# Altium PCB IF.PcbDoc
Units mil, origin at the board's own origin, x right, y up, seen from the top; angles counter-clockwise.
Board outline 3650 x 2762 mil, 2 copper layers (Top Layer, Bottom Layer); 46 components, 43 nets, 206 pads, 1032 vias.
Unrouted connection lines stored in the file: 1.
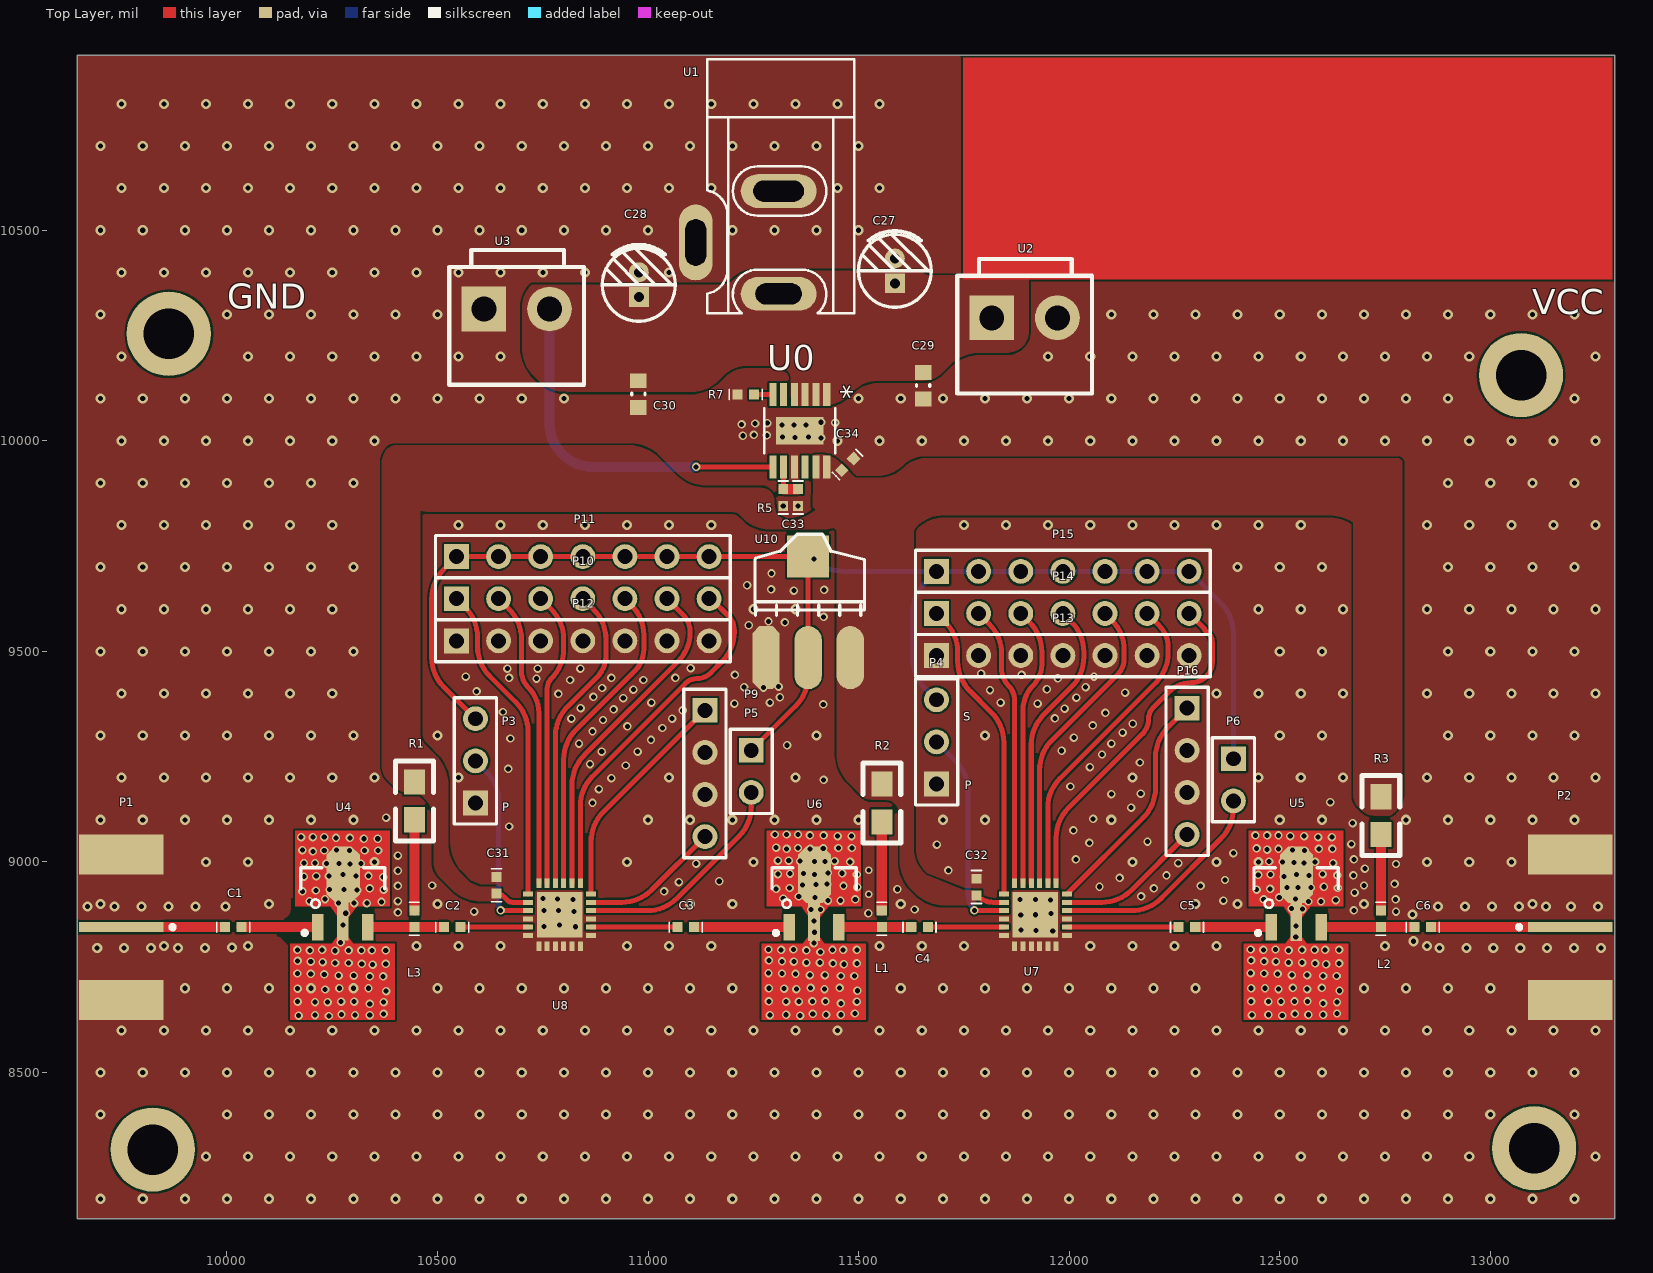
[diagram p0: Top Layer view]
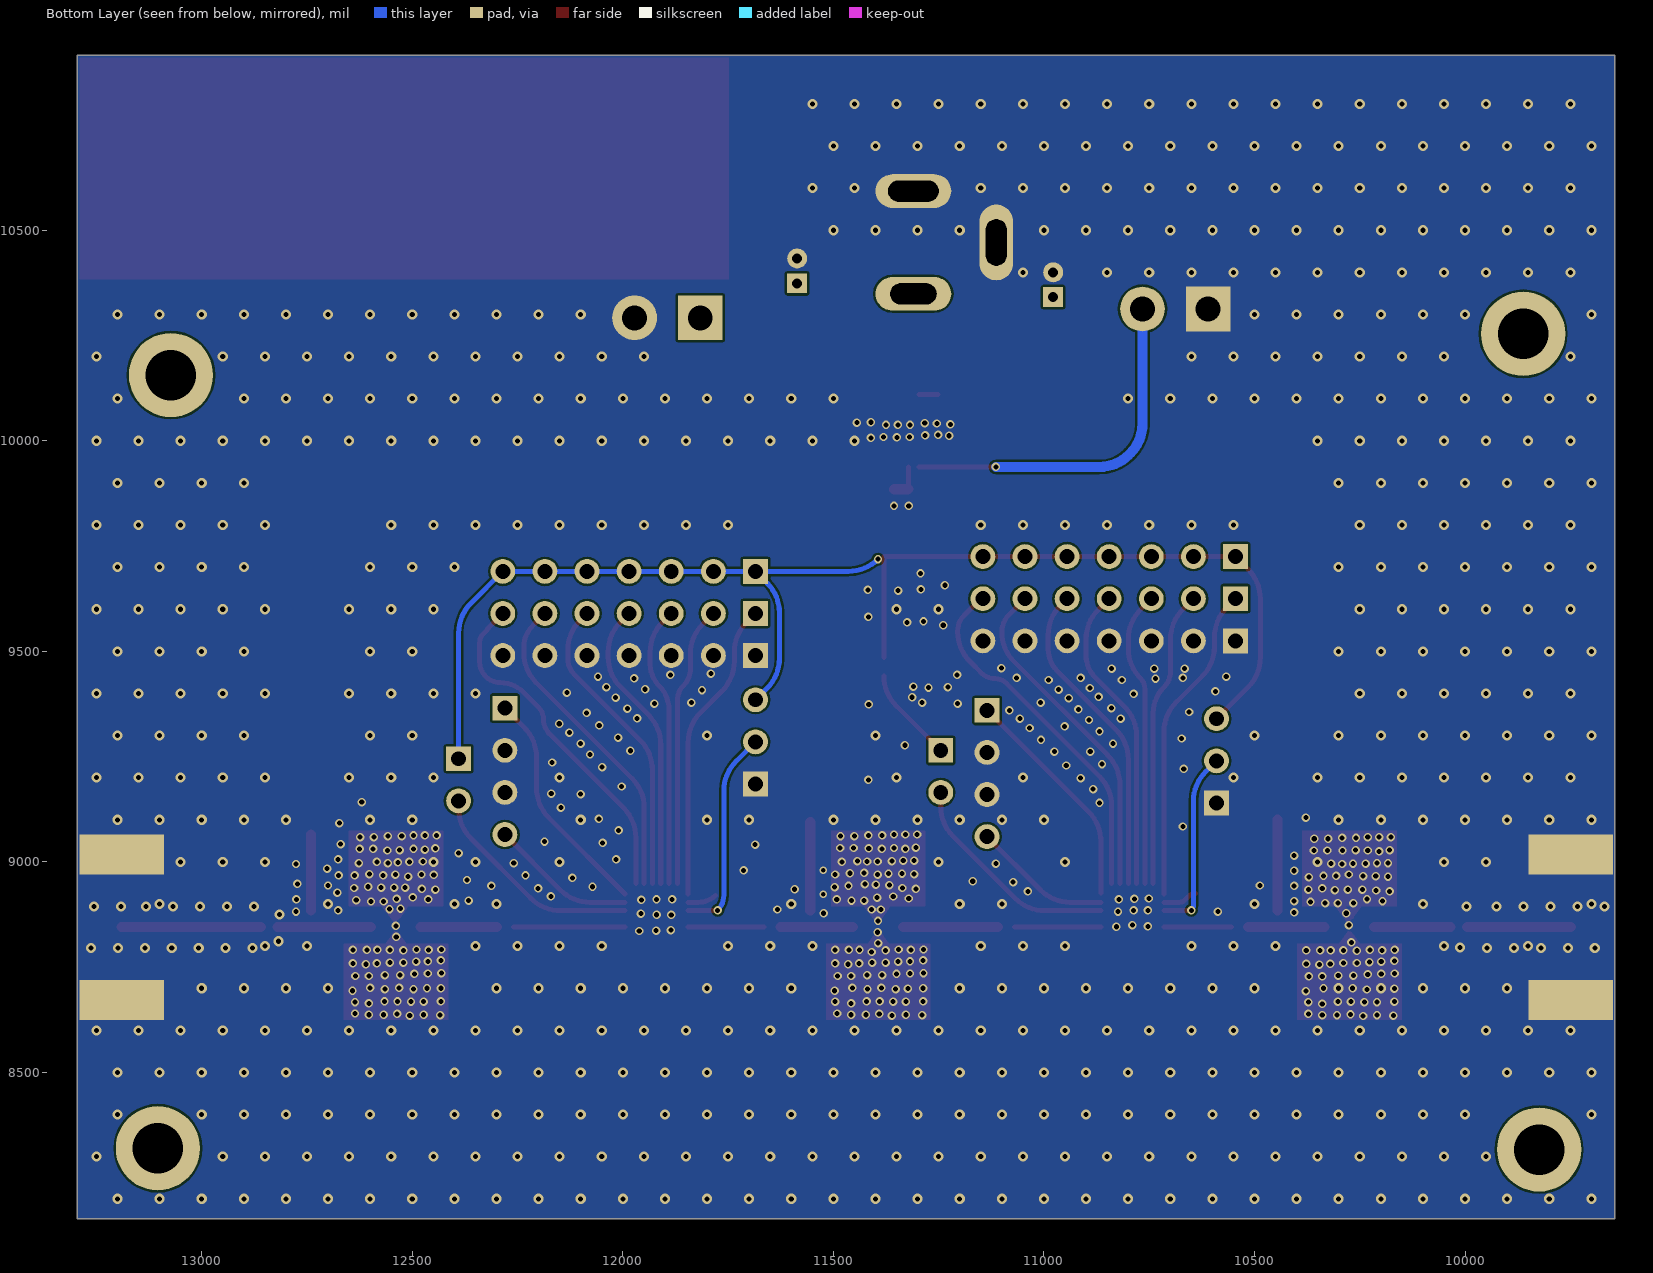
[diagram p1: Bottom Layer view, seen from below]

## Layer stack, top to bottom
Top Solder: solder mask 0.4, Solder Resist, Dk 3.5
Top Layer: signal copper 1.4
Dielectric 1: dielectric 12.6, FR-4, Dk 4.8
Bottom Layer: signal copper 1.4
Bottom Solder: solder mask 0.4, Solder Resist, Dk 3.5

## Board outline
9645,8153 9645,10915 13295,10915 13295,8153

## Design rules (kind name [scope] priority, off if disabled: settings)
Clearance [All] p1: gap=5 ignorepadtopadclearanceinfootprint=FALSE
PolygonConnect [All] p1: connectstyle=Direct reliefconductorwidth=10 reliefentries=4 polygonreliefangle="90 Angle" airgapwidth=10
RoutingVias [All] p1: holewidth=28 width=50 viastyle="Through Hole" minholewidth=28 minwidth=50 maxholewidth=28 maxwidth=50
SolderMaskExpansion [All] p1: expansion=4
Width [All] p1: maxlimit=24 minlimit=10 preferedwidth=24
30 further rules are at their usual default settings.

## Components (designator, comment, footprint, x,y, rotation, side; value= is the part's Value field where it differs from the comment)
C1 "0" 0402#1 9995,8845 r0 top
C2 "0" 0402#2 10515,8845 r0 top
C3 "0" 0402#3 11070,8845 r0 top
C4 "0" 0402#2 11625,8845 r0 top
C5 "0" 0402#3 12260,8845 r0 top
C6 "0" 0402#1 12820,8845 r0 top
C27 "0" "CAP 1.5*4*8" 11586,10403.53 r90 top
C28 "0" "CAP 1.5*4*8" 10978,10370.53 r90 top
C29 "0" 0603C 11653,10131 r270 top
C30 "4.7uF" 0603C 10977,10111 r270 top
C31 "0" 0402#4 10640,8925 r90 top
C32 "0" 0402#4 11780,8920.63 r90 top
C33 "0.47uF" 0402#4 11356,9845.63 r90 top
C34 "10uF" 0402#4 11487.84,9957.84 r225 top
L1 "500nH" 0402#2 11555,8884.37 r270 top value=100uH
L2 "500nH" 0402#1 12740,8884.37 r270 top value=100uH
L3 "500nH" 0402#1 10445,8884.37 r270 top value=100uH
P1 "SMA" SMA 9845,8840 r0 top
P2 "SMA" SMA 13094,8850 r180 top
P3 "Header 3" HDR1X3 10590,9140 r90 top
P4 "Header 3" HDR1X3 11685,9185 r90 top
P5 "Header 2" HDR1X2 11245,9265 r270 top
P6 "Header 2" HDR1X2 12390,9245 r270 top
P9 "Header 4" HDR1X4 11135,9360 r270 top
P10 "Header 7" HDR1X7 10545,9625 r0 top
P11 "Header 7" HDR1X7 10545,9725 r0 top
P12 "Header 7" HDR1X7 10545,9525 r0 top
P13 "Header 7" HDR1X7 11685,9490 r0 top
P14 "Header 7" HDR1X7 11685,9590 r0 top
P15 "Header 7" HDR1X7 11685,9690 r0 top
P16 "Header 4" HDR1X4 12280,9365 r270 top
R1 "24" 0805 10445.06,9190 r270 top
R2 "24" 0805 11555.06,9185 r270 top
R3 "24" 0805 12740.06,9155 r270 top
R5 "50K" 0402#4 11321,9845.63 r90 top
R7 "0.7K" 0402#4 11212.63,10110 r0 top
U0 "LT3045EMSE" MSOP12-MSE-RevG_ADI 11360.2,10023.98 r270 top
U1 "DC005" DC10B 11140,10768 r270 top
U2 "3.96" 3.96 11893.95,10292 r0 top
U3 "3.96" 3.96 10687.95,10313 r0 top
U4 "TQP369182" SOT89_M 10275,8926 r0 top
U5 "TQP369182" SOT89_M 12539.06,8925.87 r0 top
U6 "TQP369182" SOT89_M 11394.06,8925.87 r0 top
U7 "PE43711" PE43711 11919.8,8874.53 r0 top
U8 "PE43711" PE43711 10789.8,8874.53 r0 top
U10 "AMS1117-3.3" AMS1117 11279.97,9485.06 r0 top

## Footprints (in the part's own frame and the unit in brackets; to place one, negate y for a bottom-side part, rotate by r counter-clockwise, add the part's x,y. Pads: shape width x height; smd on the part's side, far side on the other; paste and mask are expansions set on the pad)
3.96 [mm] "接插件，25V/5A"
  rect 2.7x2.7 hole 1.5: 1(-1.98,0)
  round 2.7 hole 1.5: 2(1.982,0)
  silkscreen extent -4.06,-4.57 4.07,3.56, body extent -3.98,-4.4 4.03,4.16, height 10.5
0402#1 [mil]
  rect 24x24 smd: 1(0,0) 2(39.37,0)
  silkscreen extent -19,-12 59,12
0402#2 [mil]
  rect 24x24 smd: 1(0,0)
  rect 23.62x23.62 smd: 2(39.37,0)
  silkscreen extent -19,-12 59,12
0402#3 [mil]
  rect 23.62x23.62 smd: 1(0,0)
  rect 24x24 smd: 2(39.37,0)
  silkscreen extent -19,-12 59,12
0402#4 [mil]
  rect 23.62x23.62 smd: 1(0,0) 2(39.37,0)
  silkscreen extent -19,-12 59,12
0603C [mm] "Chip Capacitor, Body 1.6x0.8mm, Height 1.0mm, IPC Medium Density"
  rect 0.9x1 smd: 1(-0.8,0) 2(0.8,0)
  silkscreen extent -0.05,-0.4 0.05,0.4, body extent -0.87,-0.48 0.88,0.47, height 1
0805 [mil]
  rect 60x50 smd: 1(0,-0.06) 2(90,-0.06)
  silkscreen extent -50,-45 140,45
AMS1117 [mil]
  oct 65x150 smd: 1(0.03,-0.06)
  oval 65x150 smd: 2(100.03,-0.06) 3(200.03,-0.06)
  rect 100x100 smd: 4(100.03,239.94)
  silkscreen extent -26,100 234,293
"CAP 1.5*4*8" [mm] "脚距1.5mm直径4mm高度8mm"
  rect 1.2x1.2 hole 0.6: 1(-0.75,0)
  round 1.2 hole 0.6: 2(0.75,0)
  silkscreen extent -2.2,-2.2 2.41,2.2, body extent -2,-2 2.02,2, height 8.04
DC10B [mil]
  oval 80x180 hole 50 slot 110 at 90 deg: 1(419.09,170)
  oval 80x180 hole 50 slot 120 at 90 deg: 2(175,170)
  oval 180x80 hole 50 slot 110 at 0 deg: 3(297.05,-26.85)
  silkscreen extent -138,0 465,350
HDR1X2 [mm] "Connector; Header; 2 Position"
  rect 1.5x1.5 hole 0.9: 1(0,0)
  round 1.5 hole 0.9: 2(2.54,0)
  silkscreen extent -1.27,-1.27 3.81,1.27
HDR1X3 [mm] "Connector; Header; 3 Position"
  rect 1.5x1.5 hole 0.9: 1(0,0)
  round 1.5 hole 0.9: 2(2.54,0) 3(5.08,0)
  silkscreen extent -1.27,-1.27 6.35,1.27
HDR1X4 [mm] "Connector; Header; 4 Position"
  rect 1.5x1.5 hole 0.9: 1(0,0)
  round 1.5 hole 0.9: 2(2.54,0) 3(5.08,0) 4(7.62,0)
  silkscreen extent -1.27,-1.27 8.89,1.27
HDR1X7 [mm] "Connector; Header; 7 Position"
  rect 1.5x1.5 hole 0.9: 1(0,0)
  round 1.5 hole 0.9: 2(2.54,0) 3(5.08,0) 4(7.62,0) 5(10.16,0) 6(12.7,0) 7(15.24,0)
  silkscreen extent -1.27,-1.27 16.51,1.27
MSOP12-MSE-RevG_ADI [mm]
  rect 1.393x0.431 smd paste+0 mask+0: 1(-2.185,1.625) 2(-2.185,0.975) 3(-2.185,0.325) 4(-2.185,-0.325) 5(-2.185,-0.975) 6(-2.185,-1.625) 7(2.185,-1.625) 8(2.185,-0.975) 9(2.185,-0.325) 10(2.185,0.325) 11(2.185,0.975) 12(2.185,1.625)
  rect 1.651x2.845 smd paste-1.41 mask+0: EPAD(0,0)
  silkscreen extent -1.36,-2.15 1.36,2.15, body extent 0,0 0.25,0.25, height 0.25
PE43711 [mm] "5V"
  rect 0.6x0.3 smd: 1(-1.9,1.25) 2(-1.9,0.75) 3(-1.9,0.25) 4(-1.9,-0.25) 5(-1.9,-0.75) 6(-1.9,-1.25) 13(1.9,-1.25) 14(1.9,-0.75) 15(1.9,-0.25) 16(1.9,0.25) 17(1.9,0.75) 18(1.9,1.25)
  rect 0.3x0.6 smd: 7(-1.25,-1.9) 8(-0.75,-1.9) 9(-0.25,-1.9) 10(0.25,-1.9) 11(0.75,-1.9) 12(1.25,-1.9) 19(1.25,1.9) 20(0.75,1.9) 21(0.25,1.9) 22(-0.25,1.9) 23(-0.75,1.9) 24(-1.25,1.9)
  rect 2.75x2.75 smd: pad(0,0)
SMA [mil]
  rect 200x24 smd: 1(-96,5)
  rect 200x95 smd: 2(-96,-167.5) 2(-96,177.5)
  rect 200x95 smd far side: 2(-96,-167.5) 2(-96,177.5) 2(-96,177.5)
  silkscreen extent 21,0 31,10, body extent -571,-183 -9,192, height 171
SOT89_M [mm] "4.6x4.3x1.6mm(长宽高)"
  rect 0.7x1.6 smd: 1(-1.5,-2.054) 3(1.5,-2.054)
  rect 0.7x2.4 smd: 2(0,-1.676)
  oct 2x3.4 smd: 2(0.025,1.118)
  silkscreen extent -2.54,-2.52 2.54,1.52, body extent -2.3,-2.4 2.3,1.9, height 1.6

## Part data
C1 C2 C3 C4 C5 C6 C27 C28 C29 C30 C31 C32 C33 C34: library part C, "Capacitor"
L1 L2 L3: library part Inductor, "Inductor", Published=8-Jun-2000, Publisher="Altium Limited", Revision="July-2002: Re-released for DXP Platform."
P1 P2: "SMA Connector"
P3 P4: "Header, 3-Pin", LatestRevisionDate=17-Jul-2002, LatestRevisionNote="Re-released for DXP Platform.", Publisher="Altium Limited"
P5 P6: "Header, 2-Pin", LatestRevisionDate=17-Jul-2002, LatestRevisionNote="Re-released for DXP Platform.", Publisher="Altium Limited"
P9 P16: "Header, 4-Pin", LatestRevisionDate=17-Jul-2002, LatestRevisionNote="Re-released for DXP Platform.", Publisher="Altium Limited"
P10 P11 P12 P13 P14 P15: "Header, 7-Pin", LatestRevisionDate=17-Jul-2002, LatestRevisionNote="Re-released for DXP Platform.", Publisher="Altium Limited"
R1 R2 R3 R5 R7: library part Resistor, "Resistor"
U0: "No Description Available", Built_By=SunStream, Copyright="Copyright (C) 2018 Accelerated Designs. All rights reserved", Manufacturer_Part_Number=LT3045EMSE, RefDes=RefDes, SourceLibrary=Analog_Devices_Inc_2020-09-15, Type=DEV, Vendor="Analog Devices Inc"
U10: library part AMS1117

## Free pads (board coordinates)
  round 200 hole 120: 3(9824,8317) 3(9862,10254) 3(13073,10156) 3(13104,8320)

## Via types
v1: diameter 24, hole 12, Top Layer to Bottom Layer, tented both sides, 597 vias
v2: diameter 20, hole 12, Top Layer to Bottom Layer, tented both sides, 433 vias
v3: diameter 18, hole 10, Top Layer to Bottom Layer, tented both sides, 2 vias

## Nets (pads, with @x,y where several pads share a name; then routed paths per layer and width w, separated by ;. In a path a pad name is that pad's centre, name@x,y a point inside that pad or via, vN(x,y) a via of type N, cw(c..) or ccw(c..) an arc to the next point about the centre after c; other vN are vias at no path point)
3.3v: P3.3 P4.3 P5.1 P6.1 P11.1 P11.2 P11.3 P11.4 P11.5 P11.6 P11.7 P15.1 P15.2 P15.3 P15.4 P15.5 P15.6 P15.7 U10.2 U10.4 | length 3392.3
  Top Layer w12: 10515.29,9695.29 ccw(c10586,9624.58) 10486,9624.58 10486,9485.42 ccw(c10586,9485.42) 10515.29,9414.71 P3.3 ; P11.1 P11.3 P11.4 P11.5 P11.6 P11.7 U10.4 U10.2 ; P5.1 11350.71,9370.71 ccw(c11280,9441.42) U10.2@11380,9441.42
  Bottom Layer w12: v2(11394,9719) ccw(c11464.01,9789.01) 11464.01,9690 P15.1 P15.2 P15.3 P15.4 P15.5 P15.6 P15.7 12360.71,9614.29 cw(c12290,9543.58) 12390,9543.58 P6.1 ; P15.1@11657.29,9662.29 ccw(c11728,9591.58) 11628,9591.58 11628,9483.42 ccw(c11728,9483.42) 11657.29,9412.71 P4.3
5v: C31.1 C32.1 C34.2 R1.1 R2.1 R3.1 U0.10 U0.11 U0.12 U7.2 U8.2 U10.3 | length 151.4
  Top Layer w12: C31.1 cw(c10640,8901.02) 10656.96,8917.98 10665.98,8908.95 ccw(c10677.8,8920.77) 10677.8,8904.06 U8.2 ; C32.1 ccw(c11820.02,8960.65) 11803.07,8906.65 ccw(c11820.02,8960.65) 11804,8906.37 ccw(c11820.02,8960.65) 11808.37,8905.27 ccw(c11820.02,8960.65) 11820.02,8904.06 U7.2
GND: C27.2 C28.2 C29.2 C30.2 C31.2 C32.2 C33.1 C34.1 P1.2 P2.2 P3.1 P4.1 P9.2 P9.3 P12.1 P12.2 P12.3 P12.4 P12.5 P12.6 P12.7 P13.1 P13.2 P13.3 P13.4 P13.5 P13.6 P13.7 P16.2 P16.3 R5.1 R7.1 U0.9 U0.EPAD U1.2 U1.3 U2.2 U3.1 U4.2 U5.2 U6.2 U7.4 U7.6 U7.7 U7.8 U7.9 U7.10 U7.11 U7.12 U7.13 U7.15 U7.pad U8.4 U8.6 U8.7 U8.8 U8.9 U8.10 U8.11 U8.12 U8.13 U8.15 U8.pad U10.1
  other v1: 9700,8200 9800,8200 9900,8200 10000,8200 10100,8200 10200,8200 10300,8200 10400,8200 10500,8200 10600,8200 10700,8200 10800,8200 10900,8200 11000,8200 11100,8200 11200,8200 11300,8200 11400,8200 11500,8200 11600,8200 11700,8200 11800,8200 11900,8200 12000,8200 12100,8200 12200,8200 12300,8200 12400,8200 12500,8200 12600,8200 12700,8200 12800,8200 12900,8200 13000,8200 13100,8200 13200,8200 9950,8300 10050,8300 10150,8300 10250,8300 10350,8300 10450,8300 10550,8300 10650,8300 10750,8300 10850,8300 10950,8300 11050,8300 11150,8300 11250,8300 11350,8300 11450,8300 11550,8300 11650,8300 11750,8300 11850,8300 11950,8300 12050,8300 12150,8300 12250,8300 12350,8300 12450,8300 12550,8300 12650,8300 12750,8300 12850,8300 12950,8300 13250,8300 9700,8400 10000,8400 10100,8400 10200,8400 10300,8400 10400,8400 10500,8400 10600,8400 10700,8400 10800,8400 10900,8400 11000,8400 11100,8400 11200,8400 11300,8400 11400,8400 11500,8400 11600,8400 11700,8400 11800,8400 11900,8400 12000,8400 12100,8400 12200,8400 12300,8400 12400,8400 12500,8400 12600,8400 12700,8400 12800,8400 12900,8400 13000,8400 13200,8400 9700,8500 9800,8500 9900,8500 10000,8500 10100,8500 10200,8500 10300,8500 10400,8500 10500,8500 10600,8500 10700,8500 10800,8500 10900,8500 11000,8500 11100,8500 11200,8500 11300,8500 11400,8500 11500,8500 11600,8500 11700,8500 11800,8500 11900,8500 12000,8500 12100,8500 12200,8500 12300,8500 12400,8500 12500,8500 12600,8500 12700,8500 12800,8500 12900,8500 13000,8500 13100,8500 13200,8500 9750,8600 9850,8600 9950,8600 10050,8600 10150,8600 10250,8600 10350,8600 10450,8600 10550,8600 10650,8600 10750,8600 10850,8600 10950,8600 11050,8600 11150,8600 11250,8600 11350,8600 11450,8600 11550,8600 11650,8600 11750,8600 11850,8600 11950,8600 12050,8600 12150,8600 12250,8600 12350,8600 12450,8600 12550,8600 12650,8600 12750,8600 12850,8600 12950,8600 13050,8600 13150,8600 13250,8600 9900,8700 10000,8700 10100,8700 10200,8700 10300,8700 10500,8700 10600,8700 10700,8700 10800,8700 10900,8700 11000,8700 11100,8700 11200,8700 11600,8700 11700,8700 11800,8700 11900,8700 12000,8700 12100,8700 12200,8700 12300,8700 12700,8700 12800,8700 12900,8700 13000,8700 9755.84,8795.45 9819.84,8795.45 9883.84,8795.45 9947.84,8795.45 12879.1,8795.45 12943.1,8795.45 13007.1,8795.45 13071.1,8795.45 13135.1,8795.45 9691.85,8795.68 10011.84,8796.32 13199.1,8795.68 13263.1,8795.68 9850,8800 10050,8800 10450,8800 10550,8800 10650,8800 10950,8800 11050,8800 11150,8800 11550,8800 11650,8800 11750,8800 12050,8800 12150,8800 12250,8800 12350,8800 12750,8800 12850,8800 12817.17,8811.58 12815,8875.54 9669.24,8894.32 9733.24,8894.32 9996.79,8894.32 13191.79,8894.32 13255.79,8894.32 9797.24,8894.55 9861.24,8894.55 9925.24,8894.55 12876.11,8894.55 12940.11,8894.55 13004.11,8894.55 13068.11,8894.55 13132.11,8894.55 9700,8900 10100,8900 10500,8900 11100,8900 11200,8900 11600,8900 12300,8900 12400,8900 12700,8900 13100,8900 9950,9000 10050,9000 10350,9000 10950,9000 11250,9000 12150,9000 12350,9000 12450,9000 12850,9000 12950,9000 13050,9000 9700,9100 9800,9100 9900,9100 10000,9100 10100,9100 10200,9100 10300,9100 11000,9100 11100,9100 11200,9100 11300,9100 11400,9100 11500,9100 11700,9100 11800,9100 12100,9100 12500,9100 12600,9100 12800,9100 12900,9100 13000,9100 13100,9100 13200,9100 9750,9200 9850,9200 9950,9200 10050,9200 10150,9200 10250,9200 10350,9200 10550,9200 11050,9200 11350,9200 12150,9200 12450,9200 12550,9200 12650,9200 12850,9200 12950,9200 13050,9200 13150,9200 13250,9200 9700,9300 9800,9300 9900,9300 10000,9300 10100,9300 10200,9300 10300,9300 10500,9300 11400,9300 11800,9300 12500,9300 12600,9300 12900,9300 13000,9300 13100,9300 13200,9300 9750,9400 9850,9400 9950,9400 10050,9400 10150,9400 10250,9400 12350,9400 12450,9400 12550,9400 12650,9400 12850,9400 12950,9400 13050,9400 13150,9400 13250,9400 9700,9500 9800,9500 9900,9500 10000,9500 10100,9500 10200,9500 10300,9500 12500,9500 12600,9500 12900,9500 13000,9500 13100,9500 13200,9500 9750,9600 9850,9600 9950,9600 10050,9600 10150,9600 10250,9600 11250,9600 11350,9600 12450,9600 12550,9600 12650,9600 12850,9600 12950,9600 13050,9600 13150,9600 13250,9600 9700,9700 9800,9700 9900,9700 10000,9700 10100,9700 10200,9700 10300,9700 12400,9700 12500,9700 12600,9700 12900,9700 13000,9700 13100,9700 13200,9700 9750,9800 9850,9800 9950,9800 10050,9800 10150,9800 10250,9800 10550,9800 10650,9800 10750,9800 10850,9800 10950,9800 11050,9800 11150,9800 11750,9800 11850,9800 11950,9800 12050,9800 12150,9800 12250,9800 12350,9800 12450,9800 12550,9800 12850,9800 12950,9800 13050,9800 13150,9800 13250,9800 9700,9900 9800,9900 9900,9900 10000,9900 10100,9900 10200,9900 10300,9900 12900,9900 13000,9900 13100,9900 13200,9900 9750,10000 9850,10000 9950,10000 10050,10000 10150,10000 10250,10000 10350,10000 11450,10000 11550,10000 11650,10000 11750,10000 11850,10000 11950,10000 12050,10000 12150,10000 12250,10000 12350,10000 12450,10000 12550,10000 12650,10000 12750,10000 12850,10000 12950,10000 13050,10000 13150,10000 13250,10000 9700,10100 9800,10100 9900,10100 10000,10100 10100,10100 10200,10100 10300,10100 10400,10100 10500,10100 10600,10100 10700,10100 10800,10100 11500,10100 11600,10100 11700,10100 11800,10100 11900,10100 12000,10100 12100,10100 12200,10100 12300,10100 12400,10100 12500,10100 12600,10100 12700,10100 12800,10100 12900,10100 13200,10100 9750,10200 10050,10200 10150,10200 10250,10200 10350,10200 10450,10200 10550,10200 10650,10200 11950,10200 12050,10200 12150,10200 12250,10200 12350,10200 12450,10200 12550,10200 12650,10200 12750,10200 12850,10200 12950,10200 13250,10200 9700,10300 10000,10300 10100,10300 10200,10300 10300,10300 10400,10300 10500,10300 12100,10300 12200,10300 12300,10300 12400,10300 12500,10300 12600,10300 12700,10300 12800,10300 12900,10300 13000,10300 13100,10300 13200,10300 9750,10400 9850,10400 9950,10400 10050,10400 10150,10400 10250,10400 10350,10400 10450,10400 10550,10400 10650,10400 10750,10400 10850,10400 11050,10400 9700,10500 9800,10500 9900,10500 10000,10500 10100,10500 10200,10500 10300,10500 10400,10500 10500,10500 10600,10500 10700,10500 10800,10500 10900,10500 11000,10500 11200,10500 11300,10500 11400,10500 11500,10500 9750,10600 9850,10600 9950,10600 10050,10600 10150,10600 10250,10600 10350,10600 10450,10600 10550,10600 10650,10600 10750,10600 10850,10600 10950,10600 11050,10600 11150,10600 11450,10600 11550,10600 9700,10700 9800,10700 9900,10700 10000,10700 10100,10700 10200,10700 10300,10700 10400,10700 10500,10700 10600,10700 10700,10700 10800,10700 10900,10700 11000,10700 11100,10700 11200,10700 11300,10700 11400,10700 11500,10700 9750,10800 9850,10800 9950,10800 10050,10800 10150,10800 10250,10800 10350,10800 10450,10800 10550,10800 10650,10800 10750,10800 10850,10800 10950,10800 11050,10800 11150,10800 11250,10800 11350,10800 11450,10800 11550,10800
  other v2: 10242,8634 10170,8635 11361,8635 12506,8635 10209,8636 10304,8636 10339,8636 11289,8636 12434,8636 11328,8637 11423,8637 11458,8637 12473,8637 12568,8637 12603,8637 10272,8638 10372,8639 11391,8639 12536,8639 11491,8640 12636,8640 10339,8663 11458,8664 12603,8664 10209,8667 10239,8667 10372,8667 12636,8667 10168,8668 10271,8668 10302,8668 11328,8668 11358,8668 11496,8668 12473,8668 12503,8668 11287,8669 11390,8669 11421,8669 12432,8669 12535,8669 12566,8669 10378,8693 11497,8694 12642,8694 10233,8697 11352,8698 11419,8698 12497,8698 12565,8698 10168,8699 11323,8699 10267,8700 10336,8700 11287,8700 12432,8700 12465,8700 11386,8701 11455,8701 12531,8701 12600,8701 10339,8728 10371,8728 11458,8729 11490,8729 12603,8729 12635,8729 10265,8730 10301,8730 11384,8731 11420,8731 12529,8731 12565,8731 10231,8733 10199,8734 11350,8734 12495,8734 10167,8735 11318,8735 12463,8735 11286,8736 12431,8736 10346,8756 11465,8757 12610,8757 10320,8758 10377,8758 11439,8759 11496,8759 12584,8759 12641,8759 10257,8760 10289,8760 11376,8761 11408,8761 12521,8761 12553,8761 10227,8762 10199,8763 11346,8763 12491,8763 11318,8764 12463,8764 10168,8765 11287,8766 12432,8766 11409,8786 10257,8789 10197,8790 10289,8790 10319,8790 10344,8790 10377,8790 11376,8790 12521,8790 10167,8791 10226,8791 11316,8791 11438,8791 11463,8791 11496,8791 12461,8791 12553,8791 12583,8791 12608,8791 12641,8791 11286,8792 11345,8792 12431,8792 12490,8792 11393.5,8807 10270,8809 12538,8822 11395,8833 11961,8836 11921,8837 11886,8838 10828,8846 10753,8847 12539,8848 10276,8850 10790,8850 11394.06,8859.87 11885,8874 11919.8,8874.53 11957,8877 10282,8878 11523,8878 10406,8880 10587,8882 10824,8882 12776,8882 10753,8885 10787,8885 12676,8885 11387,8887 11409,8887 11633,8887 12554,8888 12528,8889 10265,8902 10302,8902 10332,8902 10367,8905 12568,8906 12598,8906 10196,8907 10406,8907 11427,8908 11457,8908 12366,8908 12633,8909 11956,8910 10822,8911 11492,8911 11883,8911 11920,8911 12462,8911 12775,8911 10232.79,8911.74 10785,8912 12537,8912 10751,8913 11321,8913 11396,8915 12498.79,8915.74 11357.79,8917.74 12171,8918 12678,8927 10179,8930 11038,8930 10211,8932 10309,8933 10244,8934 10278,8934 10372,8934 12445,8934 11592,8935 11304,8936 12477,8936 10339,8937 12201,8937 11336,8938 12638,8938 12517,8939 12543,8939 12574,8939 11497,8940 12072,8941 12605,8941 10406,8943 11464,8943 12312,8943 10487,8944 12700,8944 11367,8945 11399,8946 11425,8947 12773,8948 11073,8952 11169,8954 12370,8957 12120,8962 10371,8964 10183,8965 12510,8965 10212,8966 10242,8966 10306,8967 10336,8967 12231,8968 12569,8968 12637,8968 12675,8968 12449,8969 10276,8970 11395.06,8969.87 11496,8970 12478,8970 12540.06,8969.87 11308,8971 12602,8971 11337,8972 11369,8972 11461,8973 11427,8974 10406,8979 11713,8980 12702,8984 10292,8995 12776,8995 10236,8996 10266,8996 10318,8996 11114,8996 10183,8997 10209,8997 12259,8997 12558,8997 12627,8997 12534,8999 11480,9000 12507,9000 12584,9000 11395,9001 11420,9001 12475,9001 11361,9002 11443,9002 11308,9003 11334,9003 12016,9006 12676,9006 10406,9015 12390,9021 10204,9025 10231,9027 10291,9027 10327,9027 10359,9027 12559,9027 10179,9028 10260,9028 12530,9028 12470,9029 11329,9031 11385,9031 12497,9031 12593,9031 12625,9031 11416,9032 12445,9032 11356,9033 11452,9033 11484,9033 11304,9034 11686,9041 12670,9042 12048,9045 12186,9048 10325,9055 10358,9055 10259,9057 10292,9057 10176,9059 10204,9059 10231,9059 12591,9059 12624,9059 11450,9061 11483,9061 12525,9061 12558,9061 11384,9063 11417,9063 12442,9063 12470,9063 12497,9063 11301,9065 11329,9065 11356,9065 12010,9075 10670,9084 12673,9092 12057,9102 10378,9105 12147,9129 10868,9140 12620,9142 12100,9161 12170,9162 10883,9173 12003,9179 11417,9195 10913,9199 10668,9221 12049,9225 10947,9229 10862,9232 12168,9236 12078,9255 10890,9262 10975,9262 11982,9264 11330,9277 10836,9281 12100,9281 11007,9290 10673,9293 12011,9295 12127,9307 10868,9310 11034,9318 10951,9322 12056,9324 12151,9328 10893,9337 10818,9340 11057,9340 11966,9341 12086,9354 10655,9356 11082,9360 10918,9362 11989,9364 10840,9365 11416,9374 11205,9376 11925,9376 11008,9378 11289,9378 11837,9378 10941,9389 12017,9390 11313,9391 10870,9392 10787,9399 12133,9402 10593,9405 11812,9408 10965,9409 11947,9410 10891,9413 11274,9414 11228,9415 12039,9415 11310,9416 10815,9432 10989,9432 10735,9435 11973,9436 10670,9437 10913,9437 11065,9437 10567,9440 12059,9440 11206,9444 11887,9444 11791,9447 10666,9459 10738,9459 10839,9459 11101,9460 11239,9562 11325,9569 11286,9571 11417,9582 11346,9644 11418,9646 11292,9647 11235,9657 11293,9685 11321,9845.63 11356,9845.63 11411,10007 11349,10008 11319,10009 11381,10009 11225,10012 11282,10013 11251,10014 11318,10038 11347,10038 11375,10038 11222,10039 11254,10041 11283,10042 11444,10043 11411,10044
  other v3: 11524,8923 11524,8980
NetC1_1: C1.1 P1.1 | length 246
  Top Layer w24: P1.1 C1.1
NetC1_2: C1.2 U4.1 | length 181.4
  Top Layer w24: C1.2 U4.1@10215.82,8845
NetC2_1: C2.1 L3.2 U4.3 | length 180.8
  Top Layer w24: U4.3 L3.2@10444.87,8845.13 ; L3.2 C2.1
NetC2_2: C2.2 U8.5 | length 160.6
  Top Layer w12: C2.2 U8.5
NetC3_1: C3.1 U8.14 | length 205.4
  Top Layer w12: U8.14 C3.1
NetC3_2: C3.2 U6.1 | length 225.6
  Top Layer w24: C3.2 U6.1
NetC4_1: C4.1 L1.2 U6.3 | length 171.9
  Top Layer w24: U6.3 L1.2 C4.1
NetC4_2: C4.2 U7.5 | length 180.6
  Top Layer w12: C4.2 U7.5
NetC5_1: C5.1 U7.14 | length 265.4
  Top Layer w12: U7.14 C5.1
NetC5_2: C5.2 U5.1 | length 180.6
  Top Layer w24: C5.2 U5.1
NetC6_1: C6.1 L2.2 U5.3 | length 221.9
  Top Layer w24: U5.3 L2.2 C6.1
NetC6_2: C6.2 P2.1 | length 330.6
  Top Layer w24: C6.2 P2.1
NetC27_1: C27.1 C28.1 C29.1 C30.1 U0.1 U0.2 U0.3 U0.4 U0.7 U1.1 U2.1 U3.2 | length 860.9
  Top Layer w12: v2(11113.95,9937.95) U0.7
  Bottom Layer w24: U3.2 10766,10040.42 ccw(c10866,10040.42) 10795.29,9969.71 10797.76,9967.24 ccw(c10868.47,10037.95) 10868.47,9937.95 v2(11113.95,9937.95)
NetC33_2: C33.2 R5.2 U0.8 | length 86.7
  Top Layer w12: R5.2@11321.82,9885.82 U0.8
  Top Layer w24: R5.2@11321.82,9885.82 11322.64,9885 C33.2
NetL1_1: L1.1 R2.2 | length 210.6
  Top Layer w24: L1.1 R2.2
NetL2_1: L2.1 R3.2 | length 180.6
  Top Layer w24: L2.1 R3.2
NetL3_1: L3.1 R1.2 | length 215.6
  Top Layer w24: L3.1 R1.2
NetP3_2: P3.2 U8.3 | length 440
  Top Layer w12: v2(10650,8885) ccw(c10651.52,8886.52) 10651.52,8884.37 U8.3
  Bottom Layer w12: P3.2 10615.71,9214.29 cw(c10545,9143.58) 10645,9143.58 10645,8897.07 ccw(c10662.07,8897.07) v2(10650,8885)
NetP4_2: P4.2 U7.3 | length 500.9
  Top Layer w12: v2(11775,8885) ccw(c11776.52,8886.52) 11776.52,8884.37 U7.3
  Bottom Layer w12: P4.2 11730.71,9239.29 cw(c11660,9168.58) 11760,9168.58 11760,8921.21 ccw(c11811.21,8921.21) v2(11775,8885)
NetP5_2: P5.2 U8.16 | length 498.4
  Top Layer w12: U8.16 10997.95,8884.37 ccw(c10997.95,8984.37) 11068.66,8913.66 11215.71,9060.71 ccw(c11145,9131.42) 11245,9131.42
NetP6_2: P6.2 U7.16 | length 511.3
  Top Layer w12: U7.16 12147.95,8884.37 ccw(c12147.95,8984.37) 12218.66,8913.66 12360.71,9055.71 ccw(c12290,9126.42) P6.2@12390,9126.42
NetP9_1: P9.1 U8.18 | length 541.7
  Top Layer w12: U8.18@10864.61,8925.96 10864.61,9048.18 cw(c10964.61,9048.18) 10893.9,9118.9 P9.1
NetP9_4: P9.4 U8.17 | length 340.4
  Top Layer w12: U8.17 10895,8904.06 ; 10885.26,8904.06 10937.63,8904.06 ccw(c10937.63,9004.06) 11008.34,8933.34 P9.4
NetP10_1: P10.1 U8.1 | length 729.5
  Top Layer w12: P10.1@10565.71,9604.29 cw(c10495,9533.58) 10595,9533.58 10595,9511.42 ccw(c10695,9511.42) 10624.29,9440.71 10685.71,9379.29 cw(c10615,9308.58) 10715,9308.58 U8.1
NetP10_2: P10.2 U8.24 | length 704.9
  Top Layer w12: P10.2 10670.18,9599.82 cw(c10599.47,9529.11) 10699.47,9529.11 10699.47,9452.49 ccw(c10752.49,9452.49) 10715,9415 cw(c10653.22,9353.22) 10740.59,9353.22 U8.24
NetP10_3: P10.3 U8.23 | length 704.4
  Top Layer w12: P10.3 10770.18,9599.82 cw(c10699.47,9529.11) 10799.47,9529.11 10799.47,9505.89 cw(c10699.47,9505.89) 10770.18,9435.18 10770,9435 ccw(c10793.48,9411.52) 10760.28,9411.52 U8.23
NetP10_4: P10.4 U8.22 | length 736.5
  Top Layer w12: U8.22 10779.96,9298.54 cw(c10879.96,9298.54) 10809.25,9369.25 10878.79,9438.79 ccw(c10827.57,9490) 10900,9490 10900,9528.58 ccw(c10800,9528.58) 10870.71,9599.29 P10.4
NetP10_5: P10.5 U8.21 | length 739.2
  Top Layer w12: U8.21 10799.65,9243.22 cw(c10899.65,9243.22) 10828.93,9313.93 10968.79,9453.79 ccw(c10917.57,9505) 10990,9505 10990,9538.58 ccw(c10890,9538.58) P10.5@10960.71,9609.29
NetP10_6: P10.6 U8.20 | length 803.7
  Top Layer w12: U8.20 10819.33,9182.91 cw(c10919.33,9182.91) 10848.62,9253.62 11071.72,9476.72 ccw(c11003.43,9545) 11100,9545 ccw(c11039.64,9545) 11082.32,9587.68 P10.6
NetP10_7: P10.7 U8.19 | length 860.6
  Top Layer w12: U8.19 10839.02,9132.59 cw(c10939.02,9132.59) 10868.31,9203.3 11089.39,9424.39 cw(c11115,9398.79) 11115,9435 ccw(c11115,9483.28) 11149.14,9449.14 11175.71,9475.71 ccw(c11105,9546.42) 11205,9546.42 11205,9548.79 ccw(c11153.79,9548.79) 11190.01,9584.99 11153.54,9621.46 ccw(c11145,9612.93) P10.7
NetP14_1: P14.1 U7.1 | length 690.3
  Top Layer w12: P14.1@11705.71,9569.29 cw(c11635,9498.58) 11735,9498.58 11735,9476.42 ccw(c11835,9476.42) 11764.29,9405.71 11815.71,9354.29 cw(c11745,9283.58) 11845,9283.58 U7.1
NetP14_2: P14.2 U7.24 | length 667.2
  Top Layer w12: P14.2 11810.18,9564.82 cw(c11739.47,9494.11) 11839.47,9494.11 11839.47,9457.49 ccw(c11892.49,9457.49) 11840,9450.03 ccw(c11892.49,9457.49) 11855,9420 cw(c11817.36,9382.36) 11870.59,9382.36 U7.24
NetP14_3: P14.3 U7.23 | length 669
  Top Layer w12: P14.3 11905.71,9569.29 cw(c11835,9498.58) 11935,9498.58 11935,9468.28 cw(c11866.72,9468.28) 11915,9420 ccw(c11974.69,9360.31) 11890.28,9360.31 U7.23
NetP14_4: P14.4 U7.22 | length 671
  Top Layer w12: U7.22 11909.96,9278.54 cw(c12009.96,9278.54) 11939.25,9349.25 12005.71,9415.71 ccw(c11935,9486.42) 12035,9486.42 12035,9498.58 ccw(c11935,9498.58) P14.4@12005.71,9569.29
NetP14_5: P14.5 U7.21 | length 708.9
  Top Layer w12: U7.21 11929.65,9218.22 cw(c12029.65,9218.22) 11958.93,9288.93 12115,9445 ccw(c12077.51,9482.49) 12130.53,9482.49 12130.53,9503.05 ccw(c12030.53,9503.05) P14.5@12101.24,9573.76
NetP14_6: P14.6 U7.20 | length 768.2
  Top Layer w12: U7.20 11949.33,9129.49 cw(c12045.51,9129.49) 11977.5,9197.5 12205.71,9425.71 ccw(c12135,9496.42) 12235,9496.42 12235,9510 ccw(c12162.57,9510) 12213.79,9561.21 P14.6
NetP14_7: P14.7 U7.19 | length 830.4
  Top Layer w12: U7.19 11969.02,9057.59 cw(c12069.02,9057.59) 11998.31,9128.3 12173.66,9303.66 ccw(c12138.25,9339.06) 12185.26,9321.83 ccw(c12138.25,9339.06) 12188.32,9339.06 cw(c12227.02,9339.06) 12199.66,9366.43 12236.67,9403.44 cw(c12290,9350.1) 12290,9425.53 12290.06,9425.53 ccw(c12290.06,9474.94) 12325,9440 12325.86,9440.86 ccw(c12291.72,9475) 12340,9475 12340,9521.22 ccw(c12311.73,9521.22) 12338.65,9529.84 ccw(c12311.73,9521.22) 12331.72,9541.21 12322.17,9550.76 cw(c12325.7,9554.29) 12320.71,9554.29 P14.7
NetP16_1: P16.1 U7.18 | length 550.9
  Top Layer w12: U7.18 12175.71,9104.84 ccw(c12105,9175.56) 12205,9175.56 12205,9248.58 cw(c12305,9248.58) 12234.29,9319.29 P16.1
NetP16_4: P16.4 U7.17 | length 347.8
  Top Layer w12: U7.17 12077.63,8904.06 ccw(c12077.63,9004.06) 12148.34,8933.34 P16.4
NetR7_2: R7.2 U0.6 | length 44.2
  Top Layer w12: R7.2 U0.6
pads on no net: U0.5

## Polygon pours and split planes (outlines as drawn)
NetC27_1 on Top Layer "Top Layer-No Net" (solid, pour order 28): 10723,10370 ccw(c10776.11,10316.89) 10701,10316.89 10701,10222.42 ccw(c10801,10222.42) 10730.29,10151.71 10737.71,10144.29 ccw(c10808.42,10215) 10808.42,10115 11097.58,10115 ccw(c11097.58,10215) 11168.29,10144.29 11179,10155 cw(c11234.53,10099.47) 11234.53,10178 11299.2,10178 cw(c11299.2,10130.2) 11333,10164 cw(c11318.51,10149.51) 11339,10149.51 11339,10107.49 ccw(c11359.49,10107.49) 11345,10093 11353.59,10084.41 ccw(c11357,10087.83) 11357,10083 11410.58,10083 ccw(c11410.58,10183) 11481.29,10112.29 11488,10119 cw(c11543.53,10063.47) 11543.53,10142 11649.3,10142 ccw(c11649.3,10213.7) 11700,10163 11716.71,10179.71 cw(c11787.42,10109) 11787.42,10209 11851.37,10209 ccw(c11851.37,10263.63) 11890,10225 ccw(c11856.2,10258.8) 11904,10258.8 11904,10393 11669.9,10393 cw(c11669.9,10416.9) 11653,10400 ccw(c11643.34,10390.34) 11643.34,10404 11256.53,10404 ccw(c11256.53,10325.47) 11201,10381 cw(c11176.86,10405.14) 11176.86,10371 10725.41,10371 ccw(c10725.41,10367.59)
5v on Top Layer "Top Layer-No Net" (solid, pour order 0): 10600,8941 10641.51,8941 cw(c10641.51,8920.51) 10656,8935 10656,8921.66 cw(c10642.34,8921.66) 10652,8912 cw(c10637.51,8926.49) 10637.51,8906 10604.42,8906 cw(c10604.42,9006) 10533.71,8935.29 10505,8964 cw(c10538.8,8997.8) 10491,8997.8 10491,9099 ccw(c10418.57,9099) 10469.79,9150.21 10465,9155 ccw(c10448.1,9138.1) 10448.1,9162 10439,9162 cw(c10439,9222.36) 10396.32,9179.68 10383,9193 cw(c10419.21,9229.21) 10368,9229.21 10368,9948.2 cw(c10415.8,9948.2) 10382,9982 cw(c10398.9,9965.1) 10398.9,9989 10537,9989 cw(c10493.54,9989) 10524.27,9958.27 10480,9914 ccw(c10530.7,9863.3) 10459,9863.3 10459,9305.56 ccw(c10496.56,9305.56) 10470,9279 10495.71,9253.29 cw(c10425,9182.58) 10525,9182.58 10525,9044.42 ccw(c10625,9044.42) 10554.29,8973.71 10576,8952
5v on Top Layer "Top Layer-No Net" (solid, pour order 2): 11751,8933 11792,8933 cw(c11777.51,8918.51) 11798,8918.51 11798,8917 cw(c11781.1,8917) 11793.05,8905.05 11791,8903 cw(c11776.51,8917.49) 11776.51,8897 11704.42,8897 cw(c11704.42,8997) 11633.71,8926.29 11627.29,8932.71 cw(c11698,9003.42) 11598,9003.42 11598,9107.62 ccw(c11553.62,9107.62) 11585,9139 ccw(c11565.69,9119.69) 11565.69,9147 11533.97,9147 cw(c11533.97,9187.97) 11505,9159 11477.29,9186.71 cw(c11548,9257.42) 11448,9257.42 11448,9822.13 cw(c11512.87,9822.13) 11467,9868 cw(c11486.31,9848.69) 11486.31,9876 11547,9876 cw(c11547,9801.16) 11599.92,9854.08 11605,9849 cw(c11571.2,9815.2) 11619,9815.2 11619,9051.42 ccw(c11719,9051.42) 11648.29,8980.71 11660,8969
5v on Top Layer "Top Layer-No Net" (solid, pour order 4): 12791,9162.87 cw(c12726.13,9162.87) 12772,9117 cw(c12752.69,9136.31) 12752.69,9109 12728,9109 cw(c12728,9157.28) 12693.86,9123.14 12686,9131 cw(c12712.56,9157.56) 12675,9157.56 12675,9864.99 cw(c12774.01,9864.99) 12704,9935 cw(c12740.21,9898.79) 12740.21,9950 12778.93,9950 cw(c12778.93,9932.93) 12791,9945
5v on Top Layer "Top Layer-No Net" (solid, pour order 10): 11393.13,9966.49 cw(c11407.22,9895.13) 11450.12,9953.88 11485.71,9918.29 ccw(c11556.42,9989) 11556.42,9889 11595.2,9889 cw(c11595.2,9841.22) 11629,9875 cw(c11624.19,9870.18) 11631,9870.17 11631,9031.58 ccw(c11712.08,9031.58) 11654.75,8974.25 11610,8974 11610,9582.58 ccw(c11510.02,9582.58) 11580.71,9653.29 11390.89,9843.11
5v on Top Layer "Top Layer-No Net" (solid, pour order 12): 12791,9928.1 12791,9950.59 ccw(c12787.59,9950.59) 12790,9953 12787.12,9955.88 ccw(c12782,9950.76) 12782,9958 11658.7,9958 ccw(c11658.7,9886.3) 11608,9937 cw(c11546.92,9998.08) 11546.92,9911.7 11492.98,9911.7 11492.98,9839.61 cw(c11479.39,9839.61) 11489,9830 11516.71,9802.29 ccw(c11587.42,9873) 11587.42,9773 11631,9773 11631,9780.1 cw(c11654.9,9780.1) 11638,9797 cw(c11700.77,9734.23) 11700.77,9823 12618.58,9823 cw(c12618.58,9723) 12689.29,9793.71 12723,9760
5v on Top Layer "Top Layer-No Net" (solid, pour order 34): 10510,9989 10954.58,9989 cw(c10954.58,9889.01) 11025.29,9959.71 11066.71,9918.29 ccw(c11137.42,9989) 11137.42,9889 11266.86,9889 cw(c11266.86,9854.87) 11291,9879 cw(c11269.29,9857.28) 11300,9857.27 ccw(c11401.74,9857.27) 11305.48,9824.32 ccw(c11363,9896.71) 11331.12,9809.92 ccw(c11321.82,9931.38) 11407.95,9845.24 cw(c11473.82,9770.01) 11473.82,9870 11486,9870 11486,9822.83 cw(c11479.19,9822.82) 11484,9818 cw(c11416.41,9885.58) 11416.4,9790 11287,9790 cw(c11287,9874.49) 11227.25,9814.75 11218,9824 ccw(c11201.11,9807.12) 11201.1,9831 10481.18,9831 cw(c10481.18,9923.18) 10416,9858
GND on Top Layer "Top Layer-No Net" (solid, pour order 36): 9645,10915 13295,10915 13295,8153 9645,8153
GND on Bottom Layer "Top Layer-No Net" (solid, pour order 32): 9645,10915 13295,10915 13295,8153 9645,8153

## Other copper
Top Layer:
  rectangle net NetC27_1: 11748,10383 13290,10910
  region net GND: 12577.06,8898.87 12560.32,8911.48 12526.7,8866.87 12543.43,8854.26
  region net GND: 11432.06,8898.87 11415.32,8911.48 11381.7,8866.87 11398.43,8854.26
  region net GND: 12551.68,8823.49 12534.94,8836.1 12501.32,8791.48 12518.06,8778.87
  region net GND: 12556.89,8779.86 12574.06,8791.87 12542.01,8837.64 12524.85,8825.62
  region net GND: 12528.89,8865.86 12546.06,8877.87 12514.01,8923.64 12496.85,8911.62
  region net GND: 11406.68,8823.49 11389.94,8836.1 11356.32,8791.48 11373.06,8778.87
  region net GND: 11411.89,8779.86 11429.06,8791.87 11397.01,8837.64 11379.85,8825.62
  region net GND: 11383.89,8865.86 11401.06,8877.87 11369.01,8923.64 11351.85,8911.62
  rectangle net GND: 12426.06,8893.87 12651.06,9074.87
  rectangle net GND: 12414.06,8624.87 12663.06,8805.87
  rectangle net GND: 11281.06,8893.87 11506.06,9074.87
  rectangle net GND: 11269.06,8624.87 11518.06,8805.87
  region net GND: 10313,8899 10296.27,8911.61 10262.65,8866.99 10279.38,8854.38
  region net GND: 10264.84,8865.98 10282,8878 10249.96,8923.76 10232.79,8911.74
  region net GND: 10292.84,8779.98 10310,8792 10277.96,8837.76 10260.79,8825.74
  region net GND: 10287.62,8823.62 10270.89,8836.23 10237.27,8791.61 10254,8779
  rectangle net GND: 10150,8625 10399,8806
  rectangle net GND: 10162,8894 10387,9075
  pour cut-out: 12461.5,8895 12615.5,8895 12615.5,8807 12614.5,8808 12461.5,8808
  pour cut-out: 11317,8894 11471,8894 11471,8806 11470,8807 11317,8807
  pour cut-out: 10197,8894 10351,8894 10351,8806 10350,8807 10197,8807
  pour cut-out: 10140,8807 10128.24,8818.76 ccw(c10118,8808.51) 10118,8823 10191.76,8823 cw(c10191.76,8812.76) 10199,8820 10198.54,8819.54 ccw(c10207.07,8811) 10195,8811
  pour cut-out: 10152,8914 10152,8890.31 cw(c10124.69,8890.31) 10144,8871 10142.83,8869.83 cw(c10136,8876.66) 10136,8867 10172,8867 ccw(c10174.41,8869.41) 10174.41,8866 10193,8866 10193,8876.76 cw(c10203.24,8876.76) 10196,8884 ccw(c10188.76,8876.76) 10188.76,8887 10177,8887 cw(c10177,8911.14) 10159.93,8894.07 10159,8895

## Silkscreen, mask and mechanical layers (free items; w line width, h text height)
Top Overlay:
  text "GND" at 10001,10314 h60
  text "VCC" at 13100,10300 h60
  text "S" at 11749,9335 h20
  text "P" at 11752,9173 h20
  text "P" at 10654,9120 h20
Top Solder:
  rectangle: 11753,10383 13290,10910
  rectangle: 9645,10474 11050,10915
Bottom Solder:
  rectangle: 11237,9387 11535,9646
  rectangle: 11206,9926 11504,10114
  rectangle: 11806,8791 12013,8963
  rectangle: 10674,8772 10898,8972
  rectangle: 12397,8576 12702,9090
  rectangle: 11248,8596 11538,9099
  rectangle: 10112,8556 10415,9124
Mechanical 1:
  lines w10: 9645,8153 9645,8620 9645,10915 13210,10915 13295,10915 13295,8465 13295,8153 9645,8153

## Text inside footprints (layer, text, board x,y; h text height)
U0: Top Overlay "*" at 11436.14,10132.5 h50 r270